# Altium PCB GeekIMUv1 Reciver.PcbDoc
Units mil, origin at the board's own origin, x right, y up, seen from the top; angles counter-clockwise.
Board outline 561.21 x 1176.57 mil, 2 copper layers (Top Layer, Bottom Layer); 17 components, 22 nets, 100 pads, 28 vias.
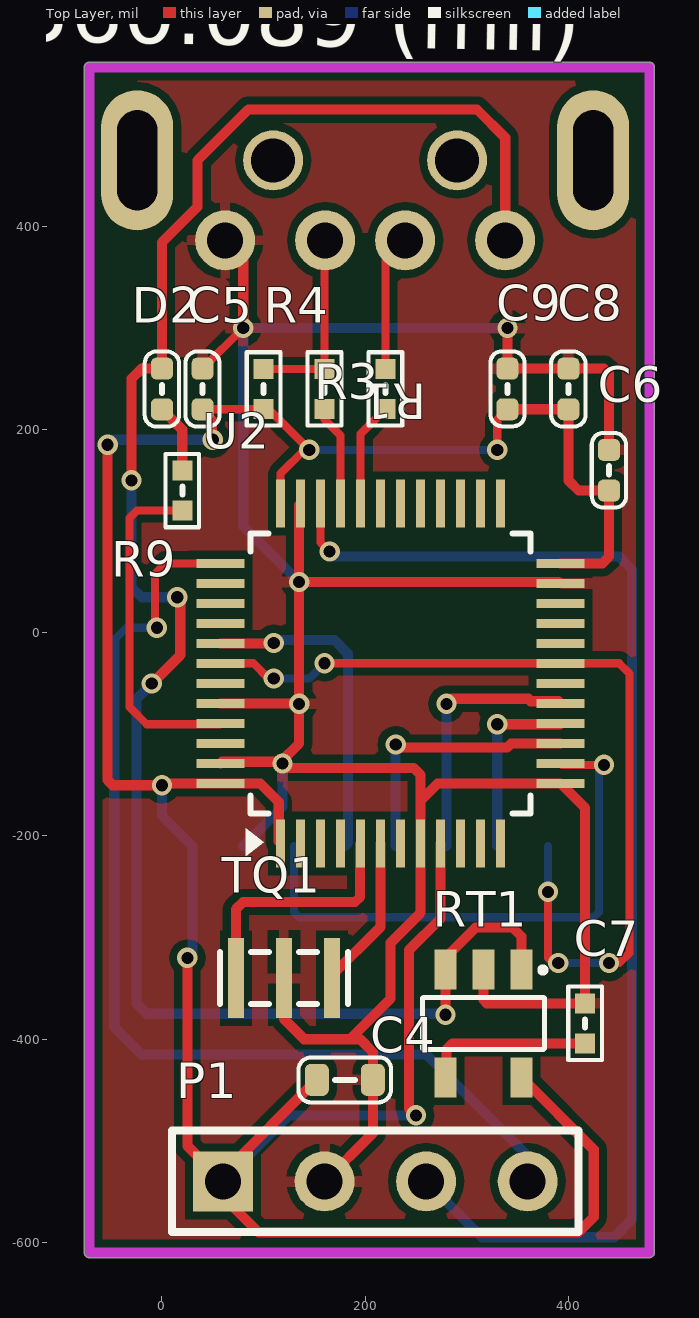
[diagram p0: Top Layer view]
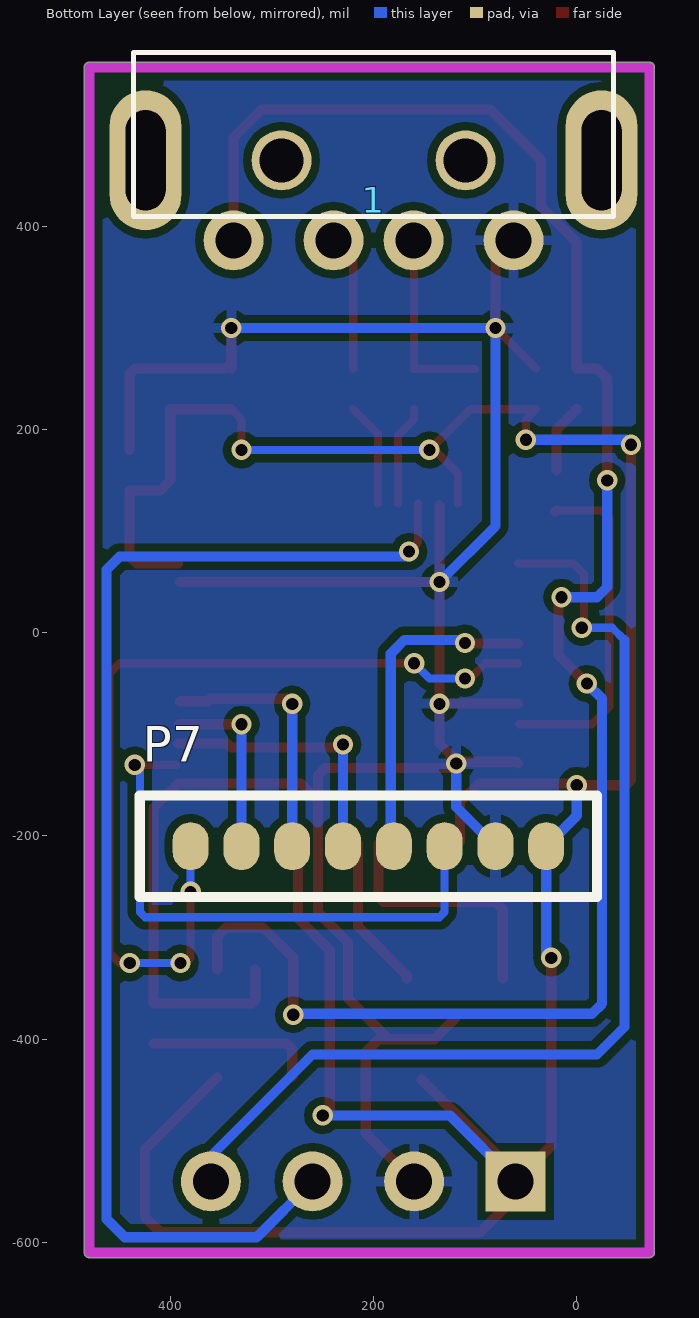
[diagram p1: Bottom Layer view, seen from below]
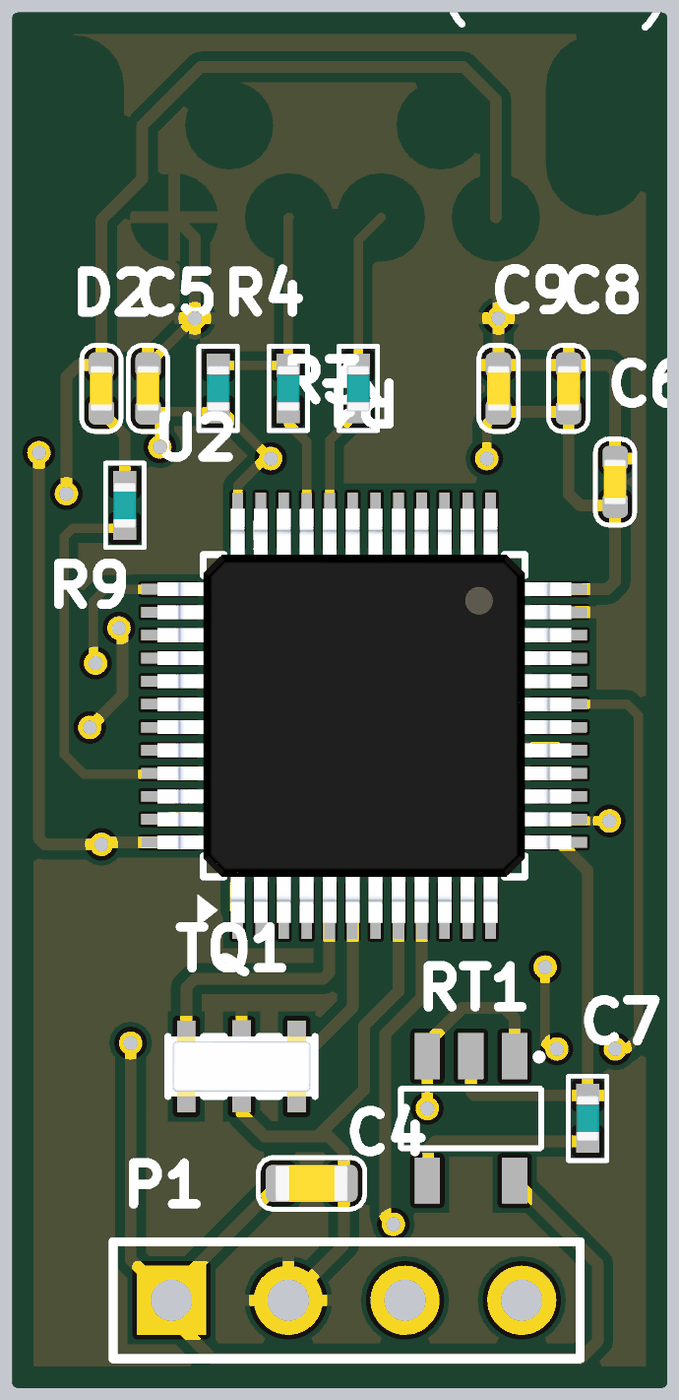
[diagram p2: 3D render of the assembled board from above, using the file's embedded part models]

## Layer stack, top to bottom
Top Layer: signal copper 1.4
Dielectric: dielectric 12.6, FR-4, Dk 4.8
Bottom Layer: signal copper 1.4

## Board outline
-76.51,-610 ccw(c-71.5,-610) -71.5,-615.01 479.69,-615.01 ccw(c479.69,-610) 484.7,-610 484.7,556.54 ccw(c479.69,556.54) 479.69,561.55 -71.5,561.55 ccw(c-71.5,556.54) -76.51,556.54

## Design rules (kind name [scope] priority, off if disabled: settings)
Clearance [All] p1: gap=8
PolygonConnect [All] p1: connectstyle=Relief reliefconductorwidth=10 reliefentries=4 polygonreliefangle="90 Angle"
RoomDefinition USB通信 [InComponentClass('USB通信')] p1: confinementstyle=ConfineIn formatcopy=TRUE lockcomponents=FALSE outline -4555,-2900 -2555,-2900 -2555,-1900 -4555,-1900
RoutingVias [All] p1: holewidth=12 width=20 viastyle="Through Hole" minholewidth=12 minwidth=20 maxholewidth=12 maxwidth=20
SilkscreenOverComponentPads [All] p1: minsilkscreentomaskgap=10
SolderMaskExpansion [All] p1: expansion=4
TestPointUsage [All] p1: valid=0 allowmultiple=FALSE
Testpoint [All] p1: side=15 testpointundercomponent=TRUE minsize=40 maxsize=100 preferedsize=60 minholesize=0 maxholesize=40 preferedholesize=32 testpointgrid=1 style=1023 order=0-112345678
Width [All] p1: maxlimit=10 minlimit=10 preferedwidth=10
23 further rules are at their usual default settings.

## Components (designator, comment, footprint, x,y, rotation, side; value= is the part's Value field where it differs from the comment)
1 "USB_CONETER" "USB A Plug" 200,780 r90 bottom
C4 "Cap" C0603 180,-440 r180 top
C5 "Cap" C0402 40,240 r270 top
C6 "Cap" C0402 440,160 r270 top
C7 "Cap" B0402 416.47,-384.41 r270 top
C8 "Cap" C0402 400,240 r270 top
C9 "Cap" C0402 340,240 r90 top (schematic designator C6)
D2 "LED1" C0402 0,240 r270 top
P1 "Header 4" HDR1X4 60,-540 r0 top
P7 "1.27header6" 1.27header6 -20,-260 r0 bottom
R1 "Res2" B0402 220,240 r270 top
R3 "Res2" B0402 160,240 r270 top
R4 "Res2" B0402 100,240 r270 top
R9 "" B0402 20,140 r90 top
RT1 "RT9193" SOT23-5 316.47,-384.41 r270 top
TQ1 "CSTCE8M00G55-R0" CSTCE 120,-340 r180 top
U2 "STM32F103C8T6" LQFP48 225,-40 r90 top

## Footprints (in the part's own frame and the unit in brackets; to place one, negate y for a bottom-side part, rotate by r counter-clockwise, add the part's x,y. Pads: shape width x height; smd on the part's side, far side on the other; paste and mask are expansions set on the pad)
1.27header6 [mm]
  oval 0.9x1.2 smd: 1(1.27,-1.27) 2(2.54,-1.27) 3(3.81,-1.27) 4(5.08,-1.27) 5(6.35,-1.27) 6(7.62,-1.27) 7(8.89,-1.27) 8(10.16,-1.27)
  silkscreen extent 0,-2.54 11.43,0
B0402 [mm]
  rect 0.5x0.5 smd: 1(-0.5,0) 2(0.5,0)
  silkscreen extent -0.92,-0.42 0.92,0.42, body extent -0.5,-0.25 0.5,0.25, height 0.6
C0402 [mm]
  rrect50% 0.55x0.55 smd: 1(-0.508,0) 2(0.508,0)
  silkscreen extent -0.93,-0.43 0.94,0.43, body extent -0.5,-0.25 0.5,0.25, height 0.56
C0603 [mm]
  rrect50% 0.6x0.8 smd: 1(-0.7,0) 2(0.7,0)
  silkscreen extent -1.16,-0.56 1.16,0.56, body extent -0.8,-0.4 0.8,0.4, height 0.55
CSTCE [mm]
  rect 0.4x2 smd: 1(-1.2,0) 2(0,0) 3(1.2,0)
  silkscreen extent -1.6,-0.65 1.6,0.65, body extent -1.6,-0.65 1.6,0.65, height 0.7
HDR1X4 [mm] "Connector; Header; 4 Position"
  rect 1.5x1.5 hole 0.9: 1(0,0)
  round 1.5 hole 0.9: 2(2.54,0) 3(5.08,0) 4(7.62,0)
  silkscreen extent -1.27,-1.27 8.89,1.27
LQFP48 [mm]
  rect 1.2x0.23 smd mask+0.064: 1(-4.25,2.75) 2(-4.25,2.25) 3(-4.25,1.75) 4(-4.25,1.25) 5(-4.25,0.75) 6(-4.25,0.25) 7(-4.25,-0.25) 8(-4.25,-0.75) 9(-4.25,-1.25) 10(-4.25,-1.75) 11(-4.25,-2.25) 12(-4.25,-2.75) 25(4.25,-2.75) 26(4.25,-2.25) 27(4.25,-1.75) 28(4.25,-1.25) 29(4.25,-0.75) 30(4.25,-0.25) 31(4.25,0.25) 32(4.25,0.75) 33(4.25,1.25) 34(4.25,1.75) 35(4.25,2.25) 36(4.25,2.75)
  rect 0.23x1.2 smd mask+0.064: 13(-2.75,-4.25) 14(-2.25,-4.25) 15(-1.75,-4.25) 16(-1.25,-4.25) 17(-0.75,-4.25) 18(-0.25,-4.25) 19(0.25,-4.25) 20(0.75,-4.25) 21(1.25,-4.25) 22(1.75,-4.25) 23(2.25,-4.25) 24(2.75,-4.25) 37(2.75,4.25) 38(2.25,4.25) 39(1.75,4.25) 40(1.25,4.25) 41(0.75,4.25) 42(0.25,4.25) 43(-0.25,4.25) 44(-0.75,4.25) 45(-1.25,4.25) 46(-1.75,4.25) 47(-2.25,4.25) 48(-2.75,4.25)
  silkscreen extent -4.57,-3.5 3.5,3.63, body extent -4.5,-4.5 4.5,4.5, height 1.5
SOT23-5 [mm] "SOT23, 5-Leads, Body 3.0x3.0mm (max), Pitch 0.95mm, IPC Medium Density"
  rect 1x0.55 smd: 1(-1.35,0.95) 2(-1.35,0) 3(-1.35,-0.95) 4(1.35,-0.95) 5(1.35,0.95)
  silkscreen extent -1.4,-1.53 0.65,1.55
"USB A Plug" [mm]
  oval 3.2x1.6 on Bottom Paste: 0(-8,-5.7) 0(-8,5.7)
  oval 3.5x1.8 hole 1 slot 2.5 at 0 deg: 0(-8,-5.7) 0(-8,5.7)
  round 1.5 hole 1.1: 0(-8,-2.3) 0(-8,2.3)
  round 1.5 hole 0.9: 1(-10,3.5) 2(-10,1) 3(-10,-1) 4(-10,-3.5)
  silkscreen extent -9.4,-6 -5.3,6, body extent -8.91,-5.96 9.42,6.04, height 4.5

## Part data
1: library part USB_conect_B, "USB"
C4 C5 C6 C7 C8 C9: "Capacitor"
D2: "Typical RED GaAs LED"
P1: "Header, 4-Pin"
R1 R3 R4: "Resistor"
R9: library part Res2, "Resistor"
RT1: "Power"
TQ1: "CERAMIC RESONATOR, 8MHz, +/-0.2%, 33pF, SMD"
U2: "STM32 ARM-based 32-bit MCU with 64 Kbytes Flash, 48-pin LQFP, Industrial Temperature"

## Via types
v1: diameter 20, hole 12, Top Layer to Bottom Layer, 28 vias

## Nets (pads, with @x,y where several pads share a name; then routed paths per layer and width w, separated by ;. In a path a pad name is that pad's centre, name@x,y a point inside that pad or via, vN(x,y) a via of type N, cw(c..) or ccw(c..) an arc to the next point about the centre after c; other vN are vias at no path point)
3.3V: C4.2 C5.2 C6.2 C8.2 C9.1 P1.1 P7.1 R4.2 RT1.5 U2.1 U2.9 U2.24 U2.36 U2.48 | length 3018.4
  Top Layer w8: v1(50,190) 50,210 C5.2 99.69,220 R4.2 104.69,220.31 v1(145,180) 140,180 116.73,156.73 U2.36 ; v1(330,180) 330,210 C9.1
  Top Layer w10: v1(-53.5,185) -53.5,-145 -48.5,-150 v1(0,-150) ; v1@1.73,-148.27 U2.48 96.73,-148.27 115,-166.54 U2.1@115,-205.59 ; v1(25,-320) 25,-505 P1.1 ; C4.2 60,-532.44 P1.1 ; v1(250,-475) 243,-468 243,-312.46 274.21,-281.24 U2.9 ; C9.1 C8.2 400,150 410,140 C6.2 440,75 433.27,68.27 U2.24 ; RT1.5 425,-508.69 425,-575 410,-590 95,-590 60,-555 P1.1
  Bottom Layer w8: v1(145,180) v1(330,180)
  Bottom Layer w10: v1(-53.5,185) -48.5,190 v1(50,190) ; v1(0,-150) 0,-180 P7.1 30,-315 v1(25,-320) ; P1.1 125,-475 v1(250,-475)
GND: 1.4 C4.1 C5.1 C6.1 C7.1 C8.1 C9.2 P1.2 P7.2 RT1.2 TQ1.2 U2.8 U2.13 U2.23 U2.35 U2.44 U2.47 | length 2832.3
  Top Layer w8: C5.1 v1(80,300)
  Top Layer w10: U2.47 59.26,-127 v1@117,-127 ; U2.44 134.53,-69.53 v1(135,-70) ; 1.4 80,368.5 v1(80,300) ; 120,-380 140,-400 185,-400 ; U2.35@135,125.91 v1(135,50) ; P1.2 207.56,-492.44 C4.1 207.56,-412.56 195,-400 185,-400 ; RT1.2 316.47,-361.47 319.72,-364.72 C7.1 416.47,-172.42 U2.13 271.26,-148.27 254.53,-165 ; C9.2 v1(340,300) ; C9.2@342.8,262.8 345.59,260 C8.1 435,260 440,255 C6.1 ; U2.23@390.91,50 v1(135,50) ; v1@117,-127 v1(118.58,-128.58) 123,-133 247.53,-133 254.53,-140 254.53,-165 ; v1@117,-127 135,-109 v1(135,-70) ; v1(135,-70) v1(135,50) ; 185,-400 225,-360 225,-305 254.53,-275.47 U2.8 254.53,-165
  Bottom Layer w10: P7.2 118.58,-171.42 v1(118.58,-128.58) ; v1(135,50) 80,105 v1(80,300) v1(340,300)
LED: R9.1 U2.45 | length 338.5
  Top Layer w8: R9.1 -24.69,120.32 -32,113 -32,-73 -15,-90 U2.45@56.89,-90
  Top Layer w10: R9.1 R9.1@21.06,119.26
Net1_2: 1.2 R1.1 | length 134.6
  Top Layer w8: R1.1 220,366.93 1.2
Net1_3: 1.3 R3.1 R4.1 | length 186.9
  Top Layer w8: R4.1 R3.1 160,385.67 1.3
NetC7_2: C7.2 RT1.4 | length 165.5
  Top Layer w10: RT1.4@280,-436.63 280,-410 285.91,-404.09 C7.2
NetD2_2: D2.2 R9.2 | length 68.6
  Top Layer w10: D2.2 20,200 20,180 R9.2
NetD3_1: 
NRF_CE: P7.3 U2.14 | length 557.5
  Top Layer w8: U2.14@393.74,-130 v1(435,-130)
  Bottom Layer w8: P7.3 130,-275 135,-280 425,-280 430,-275 430,-135 v1(435,-130)
NRF_CSN: P7.4 U2.41 | length 323.1
  Top Layer w10: U2.41 109.53,-10.47 v1(110,-10)
  Bottom Layer w10: v1(110,-10) 113,-7 169.53,-7 183,-20.47 183,-207 P7.4
NRF_IRQ: P7.8 U2.19 U2.42 | length 890.2
  Top Layer w8: U2.42 57.83,-30 89.98,-30 104.98,-45 v1(110,-45) ; v1(160,-30) 450,-30 460,-40 460,-315 450,-325 v1(440,-325) ; v1(380,-255) 380,-320 385,-325 v1(390,-325)
  Bottom Layer w8: v1(110,-45) 145,-45 v1(160,-30) ; v1(380,-255) P7.8 ; v1(390,-325) v1(440,-325)
NRST: U2.7
OSC_1: TQ1.3 U2.5 | length 247.3
  Top Layer w10: TQ1.3 72.76,-272.24 80,-265 190,-265 195,-260 U2.5@195,-207.8
OSC_2: TQ1.1 U2.6 | length 152.5
  Top Layer w10: TQ1.1 167.24,-337.3 215.16,-289.39 U2.6
SPI1_CLK: P7.5 U2.15 | length 265.3
  Top Layer w10: v1(230,-110) 233,-113 339.53,-113 343.63,-108.9 U2.15
  Bottom Layer w10: P7.5 v1(230,-110)
SPI1_MISO: P7.7 U2.16 | length 181.5
  Top Layer w10: v1(330,-90) U2.16@391.54,-90
  Bottom Layer w10: P7.7 v1(330,-90)
SPI1_MOSI: P7.6 U2.17 | length 253.2
  Top Layer w10: v1(280,-70) 285,-65 360.58,-65 362.95,-67.37 U2.17@390.17,-67.37
  Bottom Layer w10: P7.6 v1(280,-70)
SWCLK: P1.4 U2.37 | length 1035.3
  Top Layer w8: v1(-5,5) -7,7 -7,58 3.27,68.27 U2.37
  Bottom Layer w8: -47,-7 -35,5 v1(-5,5)
  Bottom Layer w10: -47,-7 -47,-388 -20,-415 260,-415 360,-515 P1.4
SWDIO: P1.3 U2.34 | length 1233.3
  Top Layer w8: U2.34 156.1,88.9 v1(165,80)
  Bottom Layer w8: v1@163.82,75 163.54,75.27 163.54,78.54 v1(165,80)
  Bottom Layer w10: v1@163.82,75 450,75 462.69,62.32 462.69,-577.32 445,-595 315,-595 P1.3
USB_DM: R1.2 U2.32 | length 103.2
  Top Layer w8: U2.32 195.47,195.79 R1.2
USB_DP: R3.2 U2.33 | length 99.5
  Top Layer w8: R3.2 160,210 175.79,194.21 U2.33
VCC: 1.1 D2.1 RT1.1 RT1.3 | length 1847.3
  Top Layer w8: v1@-31.5,151.5 v1(-30,150)
  Top Layer w10: v1(-30,150) -30,250 -20,260 D2.1 0,384.24 35,419.24 35,465 85,515 310,515 337.8,487.2 1.1 ; v1(-10,-50) 18,-22 v1@18,32 ; v1(279.07,-375.93) RT1.3 279.07,-319.76 308.83,-290 345,-290 353.87,-298.87 RT1.1
  Bottom Layer w10: v1(-30,150) -30,45 -20,35 v1(15,35) ; v1(-10,-50) -25,-65 -25,-365 -15,-375 v1@278.14,-375
pads on no net: 1.0 U2.2 U2.3 U2.4 U2.10 U2.11 U2.12 U2.18 U2.20 U2.21 U2.22 U2.25 U2.26 U2.27 U2.28 U2.29 U2.30 U2.31 U2.38 U2.39 U2.40 U2.43 U2.46

## Polygon pours and split planes (outlines as drawn)
GND on Top Layer "Keep-Out Layer-No Net" (solid, remove dead copper, pour order 1000): -200,610 -95,505 -95,-820 1055,-820 1060,-825 905,-670 905,575 -170,575 -195,600
GND on Bottom Layer "Keep-Out Layer-No Net" (solid, remove dead copper, pour order 1001): -220,620 -220,-725 -135,-810 -45,-720 655,-720 655,785 755,885 480,610 -215,610

## Keep-outs
Keep-Out Layer:
  lines w10: -1655,-55 -1650,-50 ; -285,-670 -275,-680 ; -285,1210 -275,1220 ; -71.5,-610 -71.5,556.54 479.69,556.54 479.69,-610 -71.5,-610

## Silkscreen, mask and mechanical layers (free items; w line width, h text height)
Top Overlay:
  lines w10: -304.52,-614.84 -285,-675 ; -303.96,643.4 -283.96,583.4 ; -303.96,1108.4 -283.96,1168.4 ; -295.48,510.16 -275,570 ; -295,-674.92 -275,-675.08 ; -293.96,583.4 -273.96,583.4 ; -293.96,1168.4 -273.96,1168.4 ; -285,570.08 -265,569.92 ; -283.96,624.98 -283.96,583.4 ; -283.96,1126.83 -283.96,1168.4 ; -282.9,-413.38 -285,-675 ; -277.1,308.38 -275,570 ; -264.52,-615.16 -285,-675 ; -263.96,643.4 -283.96,583.4 ; -263.96,1108.4 -283.96,1168.4 ; -255.48,509.84 -275,570 ; -164.98,726.79 -65,725 ; -125.35,706.07 -65,725 ; -124.63,746.07 -65,725 ; -65.18,715 -64.82,735 ; 494.82,705 495.18,725 ; 554.63,693.93 495,715 ; 555.35,733.93 495,715 ; 594.98,713.21 495,715
  text "585 (mil)" at -247.97,634.98 h60 r90
  text "560.089 (mil)" at -143.4,582.42 h60 r358.98
  text "1245.04 (mil)" at -246.83,-403.67 h60 r89.54